# EAGLE board ZsenzorNou_MODIF_PT_ELECROW (EAGLE 6.5.0)
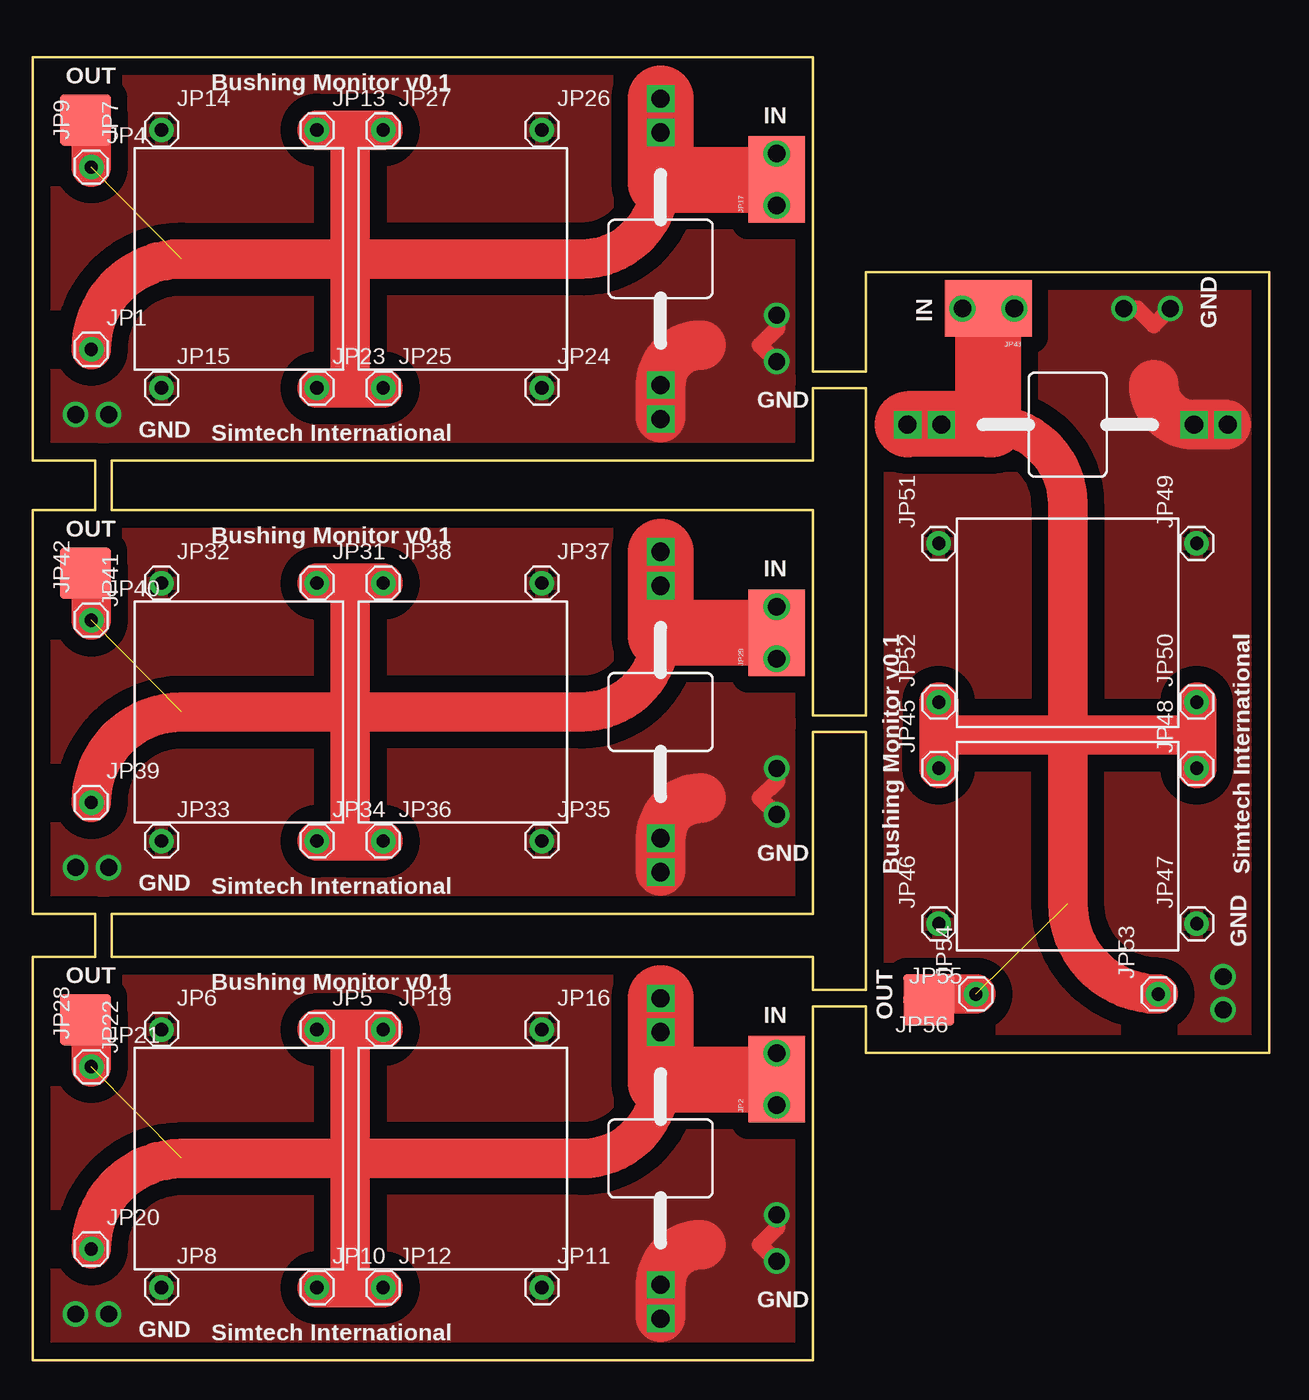
[diagram p0: board, top side]
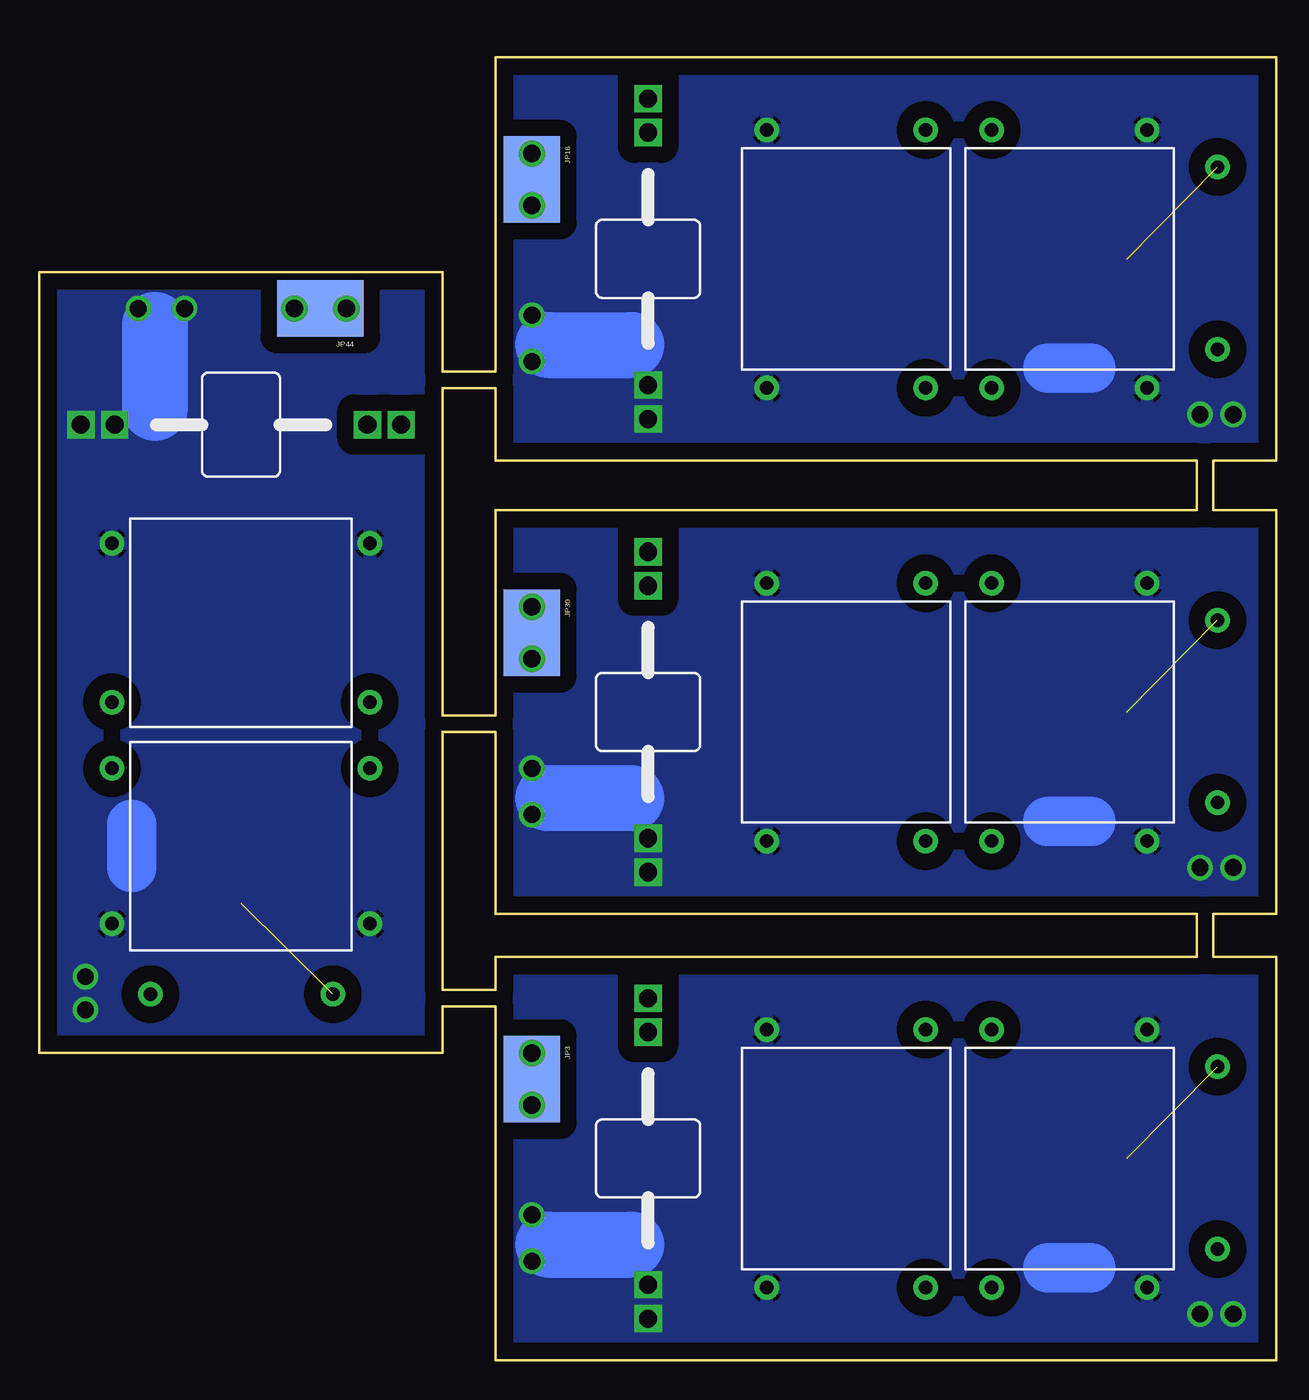
[diagram p1: board, bottom side, seen from below]

Size 95 x 100.08 mm. Coordinates in mm from the lower left corner, seen from the top.
Outline: 59.94,0 0,0 0,30.99 4.83,30.99 4.83,34.29 0,34.29 0,65.28 4.83,65.28 4.83,69.09 0,69.09 0,100.08 59.94,100.08 59.94,75.95 64.01,75.95 64.01,83.57 95,83.57 95,23.62 64.01,23.62 64.01,27.18 59.94,27.18 59.94,0
Outline: 59.94,30.99 6.1,30.99 6.1,34.29 59.94,34.29 59.94,48.26 64.01,48.26 64.01,28.45 59.94,28.45 59.94,30.99
Outline: 59.94,65.28 6.1,65.28 6.1,69.09 59.94,69.09 59.94,74.68 64.01,74.68 64.01,49.53 59.94,49.53 59.94,65.28
Copper layers (1*16): Top 0.035mm / dielectric 1.5mm / Bottom 0.035mm
Design rules "default": minimum track width 10mil, minimum drill 24mil, track to track 8mil, track to pad 8mil, pad to pad 8mil, via to via 8mil, smd to smd 8mil, copper to edge 40mil, drill to drill 8mil, minimum pad ring 10mil, minimum via ring 8mil, stop-mask expansion 4mil, vias tented up to drill 0mil, thermal gap 10mil

## Footprints (pad centres in the part's own frame; a part is rotated, then mirrored left to right if it is on the bottom)
1X01 = drill 1.016 pad 1.88: 1 0,0
SMTRA-256-8-6 = drill 1.346: P$1 -1.994,0; P$2 1.994,0 | smd 6.655 x 4.343: P$3 0,0
LUXEON-PAD = smd 3.9 x 2.4: P$1 0,0

## Placement (x,y rotation side)
JP1  M01PTH  [1X01]  4.51,77.64 0 top
JP2  M01SMTRA-256-8-6  [SMTRA-256-8-6]  57.15,21.59 90 top
JP3  M01SMTRA-256-8-6  [SMTRA-256-8-6]  57.15,21.59 270 bottom
JP4  M01PTH  [1X01]  4.51,91.64 0 top
JP5  M01PTH  [1X01]  21.84,25.4 0 top
JP6  M01PTH  [1X01]  9.91,25.4 0 top
JP7  M01SMD  [LUXEON-PAD]  3.3,95.25 270 top
JP8  M01PTH  [1X01]  9.91,5.59 0 top
JP9  M01SMD  [LUXEON-PAD]  4.83,95.25 90 top
JP10  M01PTH  [1X01]  21.84,5.59 0 top
JP11  M01PTH  [1X01]  39.12,5.59 0 top
JP12  M01PTH  [1X01]  26.92,5.59 0 top
JP13  M01PTH  [1X01]  21.84,94.49 0 top
JP14  M01PTH  [1X01]  9.91,94.49 0 top
JP15  M01PTH  [1X01]  9.91,74.68 0 top
JP16  M01PTH  [1X01]  39.12,25.4 0 top
JP17  M01SMTRA-256-8-6  [SMTRA-256-8-6]  57.15,90.68 90 top
JP18  M01SMTRA-256-8-6  [SMTRA-256-8-6]  57.15,90.68 270 bottom
JP19  M01PTH  [1X01]  26.92,25.4 0 top
JP20  M01PTH  [1X01]  4.51,8.55 0 top
JP21  M01PTH  [1X01]  4.51,22.55 0 top
JP22  M01SMD  [LUXEON-PAD]  3.3,26.16 270 top
JP23  M01PTH  [1X01]  21.84,74.68 0 top
JP24  M01PTH  [1X01]  39.12,74.68 0 top
JP25  M01PTH  [1X01]  26.92,74.68 0 top
JP26  M01PTH  [1X01]  39.12,94.49 0 top
JP27  M01PTH  [1X01]  26.92,94.49 0 top
JP28  M01SMD  [LUXEON-PAD]  4.83,26.16 90 top
JP29  M01SMTRA-256-8-6  [SMTRA-256-8-6]  57.15,55.88 90 top
JP30  M01SMTRA-256-8-6  [SMTRA-256-8-6]  57.15,55.88 270 bottom
JP31  M01PTH  [1X01]  21.84,59.69 0 top
JP32  M01PTH  [1X01]  9.91,59.69 0 top
JP33  M01PTH  [1X01]  9.91,39.88 0 top
JP34  M01PTH  [1X01]  21.84,39.88 0 top
JP35  M01PTH  [1X01]  39.12,39.88 0 top
JP36  M01PTH  [1X01]  26.92,39.88 0 top
JP37  M01PTH  [1X01]  39.12,59.69 0 top
JP38  M01PTH  [1X01]  26.92,59.69 0 top
JP39  M01PTH  [1X01]  4.51,42.84 0 top
JP40  M01PTH  [1X01]  4.51,56.84 0 top
JP41  M01SMD  [LUXEON-PAD]  3.3,60.45 270 top
JP42  M01SMD  [LUXEON-PAD]  4.83,60.45 90 top
JP43  M01SMTRA-256-8-6  [SMTRA-256-8-6]  73.41,80.77 180 top
JP44  M01SMTRA-256-8-6  [SMTRA-256-8-6]  73.41,80.77 180 bottom
JP45  M01PTH  [1X01]  69.6,45.47 90 top
JP46  M01PTH  [1X01]  69.6,33.53 90 top
JP47  M01PTH  [1X01]  89.41,33.53 90 top
JP48  M01PTH  [1X01]  89.41,45.47 90 top
JP49  M01PTH  [1X01]  89.41,62.74 90 top
JP50  M01PTH  [1X01]  89.41,50.55 90 top
JP51  M01PTH  [1X01]  69.6,62.74 90 top
JP52  M01PTH  [1X01]  69.6,50.55 90 top
JP53  M01PTH  [1X01]  86.45,28.13 90 top
JP54  M01PTH  [1X01]  72.45,28.13 90 top
JP55  M01SMD  [LUXEON-PAD]  68.83,26.92 0 top
JP56  M01SMD  [LUXEON-PAD]  68.83,28.45 180 top

## Library data of the parts
JP1-JP56 = SparkFun-Connectors

## Nets
GND: JP14.1 JP15.1 JP24.1 JP26.1
GND1: JP6.1 JP8.1 JP11.1 JP16.1
GND2: JP32.1 JP33.1 JP35.1 JP37.1
GND3: JP46.1 JP47.1 JP49.1 JP51.1
N$2: JP2.P$1 JP3.P$1 JP5.1 JP10.1 JP12.1 JP19.1 JP20.1 JP21.1 JP22.P$1 JP28.P$1
N$3: JP29.P$1 JP30.P$1 JP31.1 JP34.1 JP36.1 JP38.1 JP39.1 JP40.1 JP41.P$1 JP42.P$1
N$4: JP1.1 JP4.1 JP7.P$1 JP9.P$1 JP13.1 JP17.P$1 JP18.P$1 JP23.1 JP25.1 JP27.1
N$5: JP43.P$1 JP44.P$1 JP45.1 JP48.1 JP50.1 JP52.1 JP53.1 JP54.1 JP55.P$1 JP56.P$1

## Tracks (layer width: path | path; a pad name or v marks a point on that pad's centre or on a via)
GND  (via drill 1.3, 1.4)
  Top 1.27: v57.15,76.71 55.88,77.98 57.15,79.25 v57.15,80.26
  Top 3.81: 48.23,72.39 v48.23,74.89 arc-90 51.32,77.98
  Bottom 3.81: 17.53,76.2 14.22,76.2
  Bottom 5.08: 55.88,77.98 49.53,77.98
  other vias: 48.23,72.29 3.3,72.64 5.84,72.64
  pour Bottom (isolate 1.27): 0,100.09 60,100.09 60,69.09 0,69.09
  pour Top (isolate 1.27): 0,100.09 60,100.09 60,69.09 0,69.09
GND1  (via drill 1.3, 1.4)
  Top 1.27: v57.15,7.62 55.88,8.89 57.15,10.16 v57.15,11.18
  Top 3.81: 48.23,3.3 v48.23,5.8 arc-90 51.32,8.89
  Bottom 3.81: 17.53,7.11 14.22,7.11
  Bottom 5.08: 55.88,8.89 49.53,8.89
  other vias: 48.23,3.2 3.3,3.56 5.84,3.56
  pour Bottom (isolate 1.27): 0,31 60,31 60,0 0,0
  pour Top (isolate 1.27): 0,31 60,31 60,0 0,0
GND2  (via drill 1.3, 1.4)
  Top 1.27: v57.15,41.91 55.88,43.18 57.15,44.45 v57.15,45.47
  Top 3.81: 48.23,37.59 v48.23,40.09 arc-90 51.32,43.18
  Bottom 3.81: 17.53,41.4 14.22,41.4
  Bottom 5.08: 55.88,43.18 49.53,43.18
  other vias: 48.23,37.49 3.3,37.85 5.84,37.85
  pour Bottom (isolate 1.27): 0,65.29 60,65.29 60,34.29 0,34.29
  pour Top (isolate 1.27): 0,65.29 60,65.29 60,34.29 0,34.29
GND3  (via drill 1.3, 1.4)
  Top 1.27: v87.38,80.77 86.11,79.5 84.84,80.77 v83.82,80.77
  Top 3.81: 91.69,71.85 v89.2,71.85 arc-90 86.11,74.94
  Bottom 3.81: 87.88,41.15 87.88,37.85
  Bottom 5.08: 86.11,79.5 86.11,73.15
  other vias: 91.8,71.85 91.44,26.92 91.44,29.46
  pour Bottom (isolate 1.27): 64,23.62 64,83.62 95,83.62 95,23.62
  pour Top (isolate 1.27): 64,23.62 64,83.62 95,83.62 95,23.62
N$2  (1 unrouted)
  Top 1.27: JP3.P$1 56.13,22.57 56.13,22.35 56.9,21.59 | JP2.P$1 56.13,20.61 56.13,21.08 56.64,21.59 | JP22.P$1 JP28.P$1 4.51,26.48
  Top 3.048: JP5.1 24.38,25.4 | 24.38,25.4 24.38,15.49 | 24.38,15.49 24.38,5.59 | 24.38,5.59 JP10.1 | 24.38,5.59 JP12.1 | JP19.1 24.38,25.4 | 24.38,15.49 42.16,15.49 arc90 48.26,21.59 | 56.64,21.59 56.9,21.59 57.15,21.59 | JP20.1 arc-90 11.45,15.49 24.38,15.49 | 4.51,26.48 JP21.1
  Top 5.08: 48.26,21.59 56.64,21.59
N$3  (1 unrouted)
  Top 1.27: JP30.P$1 56.13,56.86 56.13,56.64 56.9,55.88 | JP29.P$1 56.13,54.9 56.13,55.37 56.64,55.88 | JP41.P$1 JP42.P$1 4.51,60.77
  Top 3.048: JP31.1 24.38,59.69 | 24.38,59.69 24.38,49.78 | 24.38,49.78 24.38,39.88 | 24.38,39.88 JP34.1 | 24.38,39.88 JP36.1 | JP38.1 24.38,59.69 | 24.38,49.78 42.16,49.78 arc90 48.26,55.88 | 56.64,55.88 56.9,55.88 57.15,55.88 | JP39.1 arc-90 11.45,49.78 24.38,49.78 | 4.51,60.77 JP40.1
  Top 5.08: 48.26,55.88 56.64,55.88
N$4  (1 unrouted)
  Top 1.27: JP18.P$1 56.13,91.66 56.13,91.44 56.9,90.68 | JP17.P$1 56.13,89.7 56.13,90.17 56.64,90.68 | JP7.P$1 JP9.P$1 4.51,95.57
  Top 3.048: JP13.1 24.38,94.49 | 24.38,94.49 24.38,84.58 | 24.38,84.58 24.38,74.68 | 24.38,74.68 JP23.1 | 24.38,74.68 JP25.1 | JP27.1 24.38,94.49 | 24.38,84.58 42.16,84.58 arc90 48.26,90.68 | 56.64,90.68 56.9,90.68 57.15,90.68 | JP1.1 arc-90 11.45,84.58 24.38,84.58 | 4.51,95.57 JP4.1
  Top 5.08: 48.26,90.68 56.64,90.68
N$5  (1 unrouted)
  Top 1.27: JP44.P$1 72.43,79.76 72.64,79.76 73.41,80.52 | JP43.P$1 74.38,79.76 73.91,79.76 73.41,80.26 | JP55.P$1 JP56.P$1 68.51,28.13
  Top 3.048: JP45.1 69.6,48.01 | 69.6,48.01 79.5,48.01 | 79.5,48.01 89.41,48.01 | 89.41,48.01 JP48.1 | 89.41,48.01 JP50.1 | JP52.1 69.6,48.01 | 79.5,48.01 79.5,65.79 arc90 73.41,71.88 | 73.41,80.26 73.41,80.52 73.41,80.77 | JP53.1 arc-90 79.5,35.07 79.5,48.01 | 68.51,28.13 JP54.1
  Top 5.08: 73.41,71.88 73.41,80.26
SIG  (via drill 1.4)
  Top 1.27: v48.23,94.29 v48.23,96.89 48.26,96.89
  Top 3.048: 48.26,96.89 48.26,97.28
  Top 5.08: 48.26,90.42 48.26,96.89
SIG1  (via drill 1.4)
  Top 1.27: v48.23,25.2 v48.23,27.8 48.26,27.8
  Top 3.048: 48.26,27.8 48.26,28.19
  Top 5.08: 48.26,21.34 48.26,27.8
SIG2  (via drill 1.4)
  Top 1.27: v48.23,59.49 v48.23,62.09 48.26,62.09
  Top 3.048: 48.26,62.09 48.26,62.48
  Top 5.08: 48.26,55.63 48.26,62.09
SIG3  (via drill 1.4)
  Top 1.27: v69.8,71.85 v67.2,71.85 67.2,71.88
  Top 3.048: 67.2,71.88 66.8,71.88
  Top 5.08: 73.66,71.88 67.2,71.88

## Text on the board
tPlace: OUT | Bushing Monitor v0.1 | IN | IN | GND | GND | GND | Simtech International | OUT | Bushing Monitor v0.1 | IN | GND | Bushing Monitor v0.1 | Simtech International | GND | Simtech International | GND | OUT | Bushing Monitor v0.1 | IN | OUT | GND | GND | Simtech International